# EAGLE board handle board (EAGLE 7.6.0)
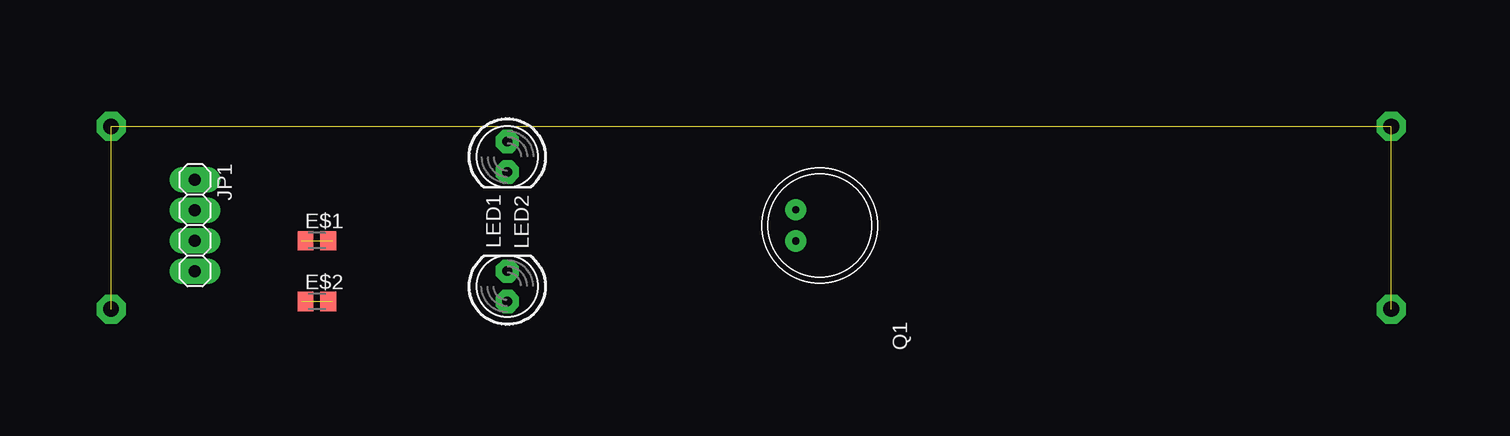
[diagram p0: board, top side]
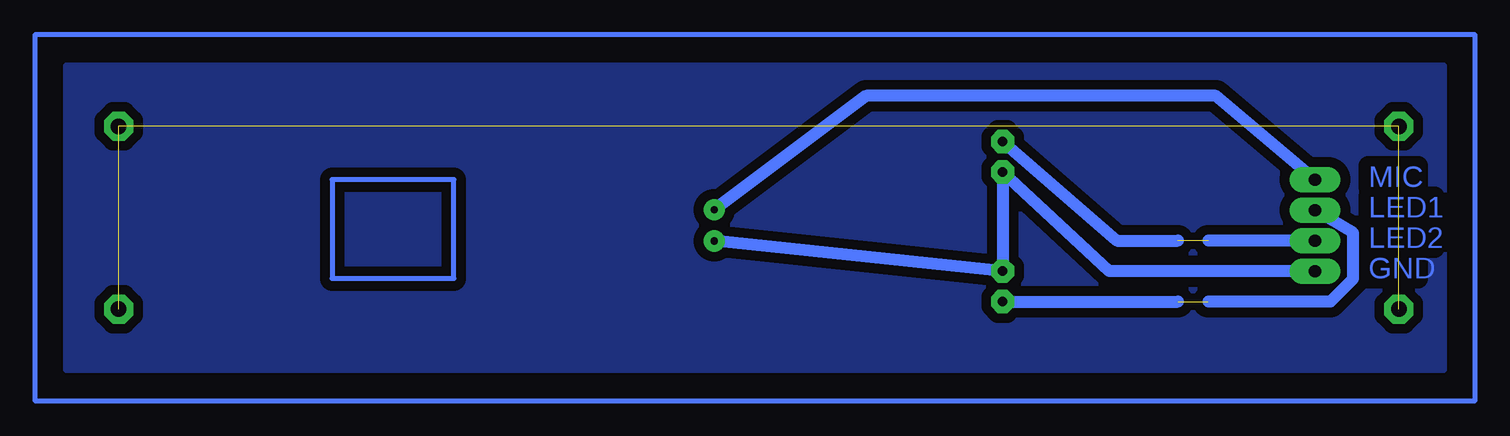
[diagram p1: board, bottom side, seen from below]

No outline drawn. Coordinates in mm, seen from the top.
Copper layers (1*16): Top 0.035mm / dielectric 1.5mm / Bottom 0.035mm
Design rules "default *": minimum track width 10mil, minimum drill 24mil, track to track 8mil, track to pad 8mil, pad to pad 8mil, via to via 8mil, smd to smd 8mil, copper to edge 40mil, drill to drill 8mil, minimum pad ring 22mil, minimum via ring 22mil, stop-mask expansion 4mil, vias tented up to drill 0mil, thermal gap 10mil

## Footprints (pad centres in the part's own frame; a part is rotated, then mirrored left to right if it is on the bottom)
M0805 = smd 1.3 x 1.6: 1 -0.95,0; 2 0.95,0
1X04 = drill 1.016 long: 1 -3.81,0; 2 -1.27,0; 3 1.27,0; 4 3.81,0
LED5MM = drill 0.813 pad 1.676 octagon: A -1.27,0; K 1.27,0
9.7ELECTRET = drill 0.6 pad 1.778: + 1.3,2; - -1.3,2

## Placement (x,y rotation side)
E$1  [M0805]  29.21,29.21 0 top
E$2  [M0805]  29.21,24.13 0 top
JP1  [1X04]  19.05,30.48 270 top
LED1  [LED5MM]  45.09,25.4 90 top
LED2  [LED5MM]  45.09,36.2 270 top
Q1  [9.7ELECTRET]  71.12,30.48 90 top

## Library data of the parts
E$1 E$2 LED1 LED2 Q1 = adafruit
JP1 = pinhead

## Nets
N$1: JP1.1 Q1.+
N$2: JP1.2 LED1.A
N$3: JP1.3 LED2.A
N$4: JP1.4 LED1.K LED2.K Q1.-

## Tracks (layer width: path | path; a pad name or v marks a point on that pad's centre or on a via)
N$1
  Bottom 1.016: JP1.1 27.3,41.27 56.45,41.27 Q1.+
N$2  (1 unrouted)
  Bottom 1.016: JP1.2 15.88,29.84 15.88,26.04 17.78,24.13 27.94,24.13 | LED1.A 30.48,24.13
N$3  (1 unrouted)
  Bottom 1.016: LED2.A 35.56,29.21 30.48,29.21 | JP1.3 27.94,29.21
N$4
  Bottom 0.406: LED1.K 45.02,26.67
  Bottom 1.016: LED1.K LED2.K 36.2,26.67 JP1.4 | 45.02,26.67 Q1.-
N$5
  pour Bottom (isolate 0.813): 8.26,43.81 123.19,43.81 123.19,18.41 8.26,18.41
N$6  (via drill 1.3)  (3 unrouted)
  other vias: 12.06,38.73 12.06,23.5 118.75,38.73 118.75,23.5
N$7
  Bottom 0.406: 90.81,26.04 90.81,34.29 100.97,34.29 100.97,26.04 90.81,26.04
N$8
  Bottom 0.406: 5.71,46.35 125.73,46.35 125.73,15.88 5.71,15.88 5.71,46.35

## Text on the board
Bottom: MIC | LED1 | LED2 | GND